# EAGLE board temperature measurement module (EAGLE 5.03)
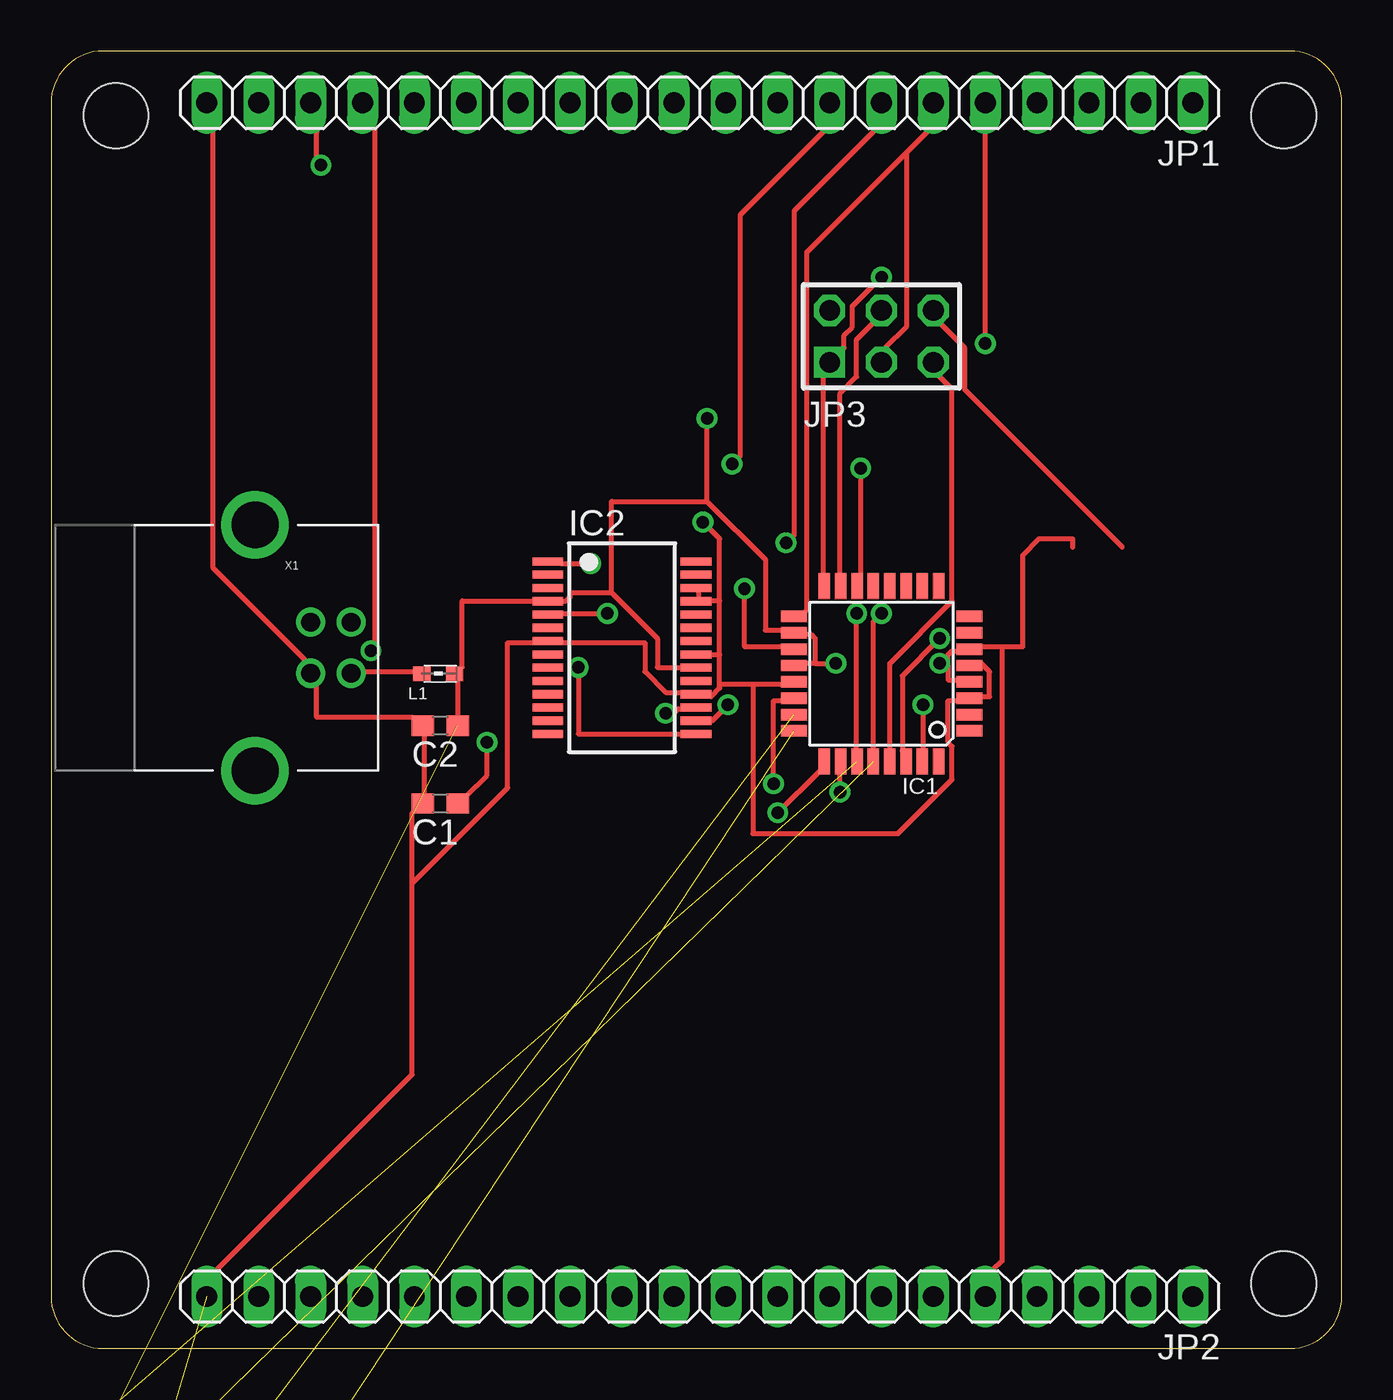
[diagram p0: board, top side]
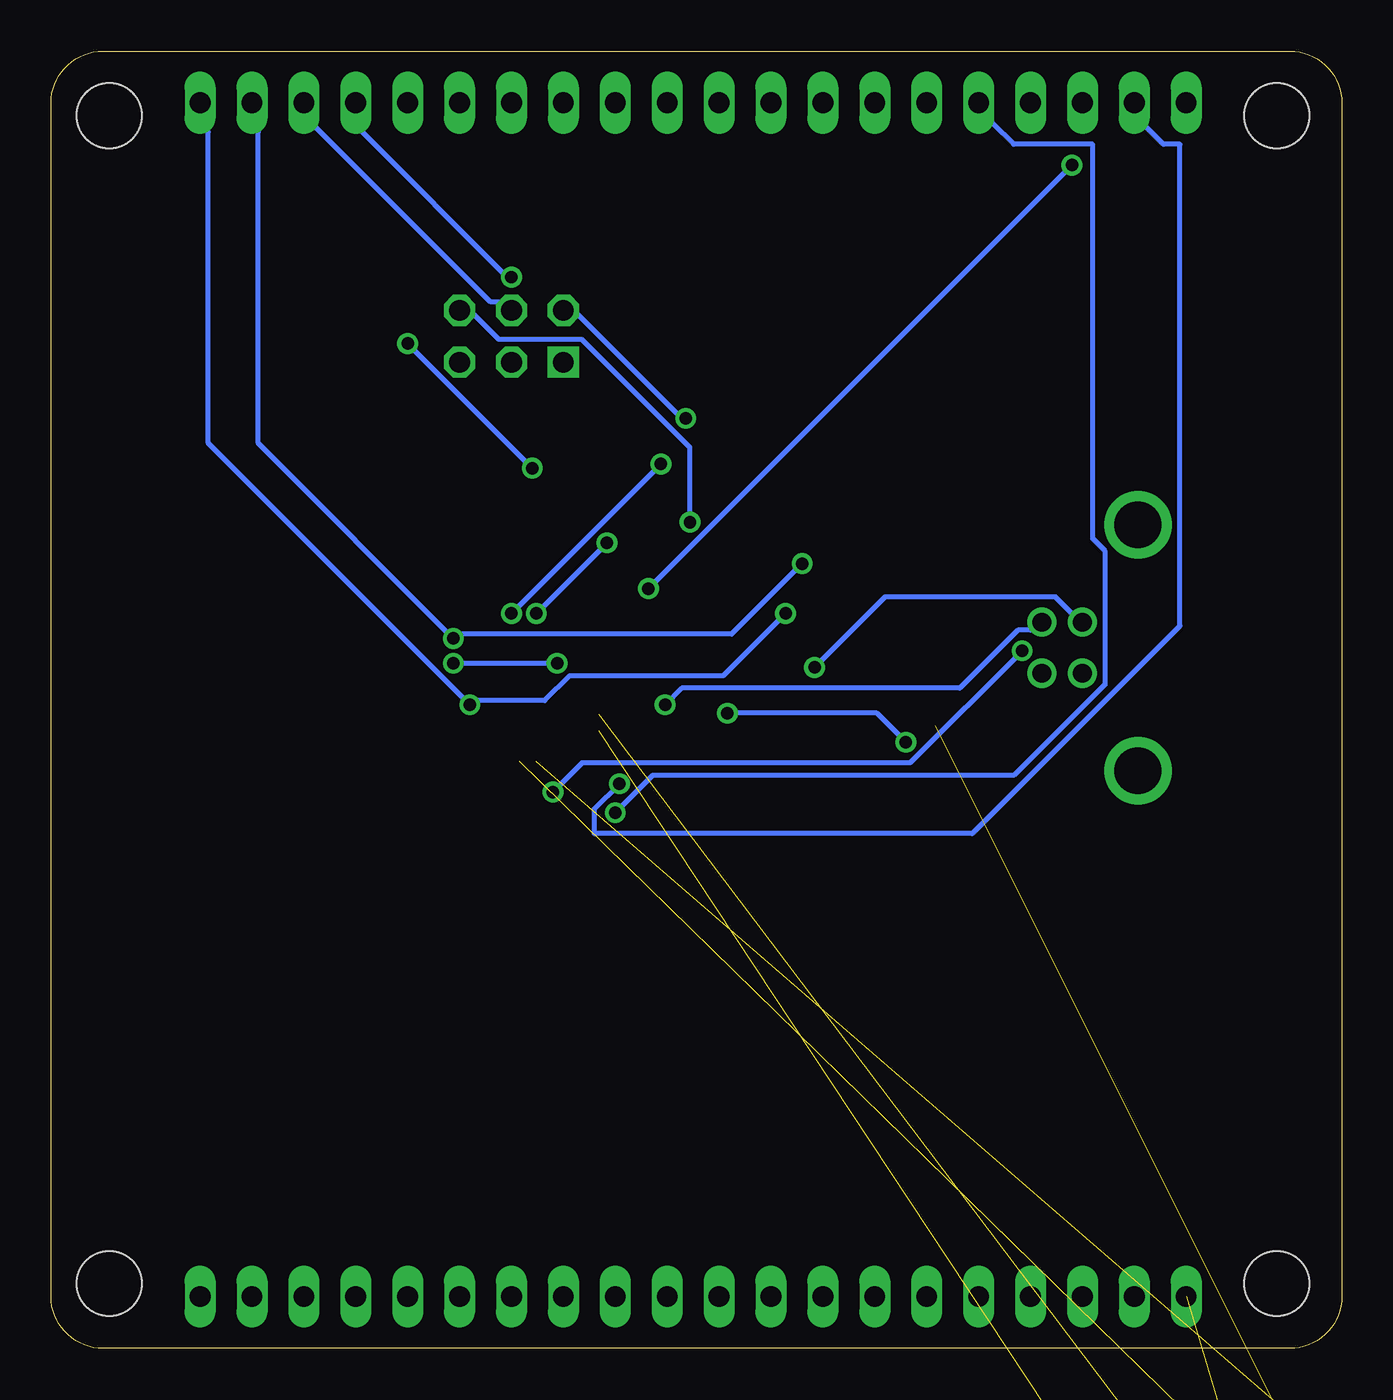
[diagram p1: board, bottom side, seen from below]

Size 63.17 x 63.49 mm. Coordinates in mm from the lower left corner, seen from the top.
Outline: 60.63,0 arc90 63.17,2.54 63.17,60.95 arc90 60.63,63.49 2.54,63.49 arc90 0,60.95 0,2.54 arc90 2.54,0 60.63,0
Copper layers (1*16): Top 0.035mm / dielectric 1.5mm / Bottom 0.035mm
Design rules "default": minimum track width 10mil, minimum drill 24mil, track to track 8mil, track to pad 8mil, pad to pad 8mil, via to via 8mil, smd to smd 8mil, copper to edge 40mil, drill to drill 8mil, minimum pad ring 10mil, minimum via ring 8mil, stop-mask expansion 4mil, vias tented up to drill 0mil, thermal gap 10mil
Holes 3.17 mm at 3.17,3.17 60.33,3.17 60.33,60.33 3.17,60.33

## Footprints (pad centres in the part's own frame; a part is rotated, then mirrored left to right if it is on the bottom)
C0603 = smd 1.1 x 1: 1 -0.85,0; 2 0.85,0
TQFP32-08 = smd 1.27 x 0.559: 1 -4.293,2.8; 2 -4.293,2; 3 -4.293,1.2; 4 -4.293,0.4; 5 -4.293,-0.4; 6 -4.293,-1.2; 7 -4.293,-2; 8 -4.293,-2.8; 17 4.293,-2.8; 18 4.293,-2; 19 4.293,-1.2; 20 4.293,-0.4; 21 4.293,0.4; 22 4.293,1.2; 23 4.293,2; 24 4.293,2.8 | smd 0.559 x 1.27: 9 -2.8,-4.293; 10 -2,-4.293; 11 -1.2,-4.293; 12 -0.4,-4.293; 13 0.4,-4.293; 14 1.2,-4.293; 15 2,-4.293; 16 2.8,-4.293; 25 2.8,4.293; 26 2,4.293; 27 1.2,4.293; 28 0.4,4.293; 29 -0.4,4.293; 30 -1.2,4.293; 31 -2,4.293; 32 -2.8,4.293
SSOP28 = smd 0.4 x 1.5: 1 -4.225,-3.625; 2 -3.575,-3.625; 3 -2.925,-3.625; 4 -2.275,-3.625; 5 -1.625,-3.625; 6 -0.975,-3.625; 7 -0.325,-3.625; 8 0.325,-3.625; 9 0.975,-3.625; 10 1.625,-3.625; 11 2.275,-3.625; 12 2.925,-3.625; 13 3.575,-3.625; 14 4.225,-3.625; 15 4.225,3.625; 16 3.575,3.625; 17 2.925,3.625; 18 2.275,3.625; 19 1.625,3.625; 20 0.975,3.625; 21 0.325,3.625; 22 -0.325,3.625; 23 -0.975,3.625; 24 -1.625,3.625; 25 -2.275,3.625; 26 -2.925,3.625; 27 -3.575,3.625; 28 -4.225,3.625
1X20 = drill 1.016 long: 1 -24.13,0; 2 -21.59,0; 3 -19.05,0; 4 -16.51,0; 5 -13.97,0; 6 -11.43,0; 7 -8.89,0; 8 -6.35,0; 9 -3.81,0; 10 -1.27,0; 11 1.27,0; 12 3.81,0; 13 6.35,0; 14 8.89,0; 15 11.43,0; 16 13.97,0; 17 16.51,0; 18 19.05,0; 19 21.59,0; 20 24.13,0
AVR-ISP-6 = drill 1.016 square: 1 -2.54,-1.27 | drill 1.016 octagon: 2 -2.54,1.27; 3 0,-1.27; 4 0,1.27; 5 2.54,-1.27; 6 2.54,1.27
1X02 = drill 1.016 long: 1 -1.27,0; 2 1.27,0
SCREWTERMINAL-3.5MM-2 = drill 1.2 pad 2.032 square: 1 0,0 | drill 1.2 pad 2.032 round: 2 3.5,0
0603 = smd 0.85 x 0.7: 1 -0.9,0; 2 0.7,0
R0603 = smd 1.1 x 1: 1 -0.85,0; 2 0.85,0
0603' = smd 1 x 1.1: 1 -0.85,1.27; 2 0.85,1.27
USB-B-PTH = drill 0.914 round: D+ 0,1.25; D- 1.981,1.25; GND 0,-1.25; VBUS 1.981,-1.25 | drill 2.286 round: P$1 -2.718,-6.02; P$2 -2.718,6.02

## Placement (x,y rotation side)
C1  [C0603]  19.05,26.67 180 top
C2  [C0603]  19.05,30.48 180 top
IC1  ATMEGA168-20A  [TQFP32-08]  40.64,33.02 180 top
IC2  FT232RL  [SSOP28]  27.94,34.29 270 top
JP1  [1X20]  31.75,60.96 180 top
JP2  [1X20]  31.75,2.54 180 top
JP3  AVR-ISP-6  [AVR-ISP-6]  40.64,49.53 0 top
JP4  [1X02]  3.81,-34.29 0 top  (outside the outline)
JP5  [SCREWTERMINAL-3.5MM-2]  2.54,-40.64 0 top  (outside the outline)
L1  [0603]  19.05,33.02 0 top
R1  10k  [R0603]  1.27,-5.08 0 top  (outside the outline)
R2  10k  [R0603]  1.27,-10.16 0 top  (outside the outline)
R3  [R0603]  1.27,-16.51 0 top  (outside the outline)
R4  [R0603]  1.27,-21.59 0 top  (outside the outline)
U$1  THERMISTOR  [0603']  1.27,-27.94 0 top  (outside the outline)
X1  USBPTH  [USB-B-PTH]  12.7,34.29 0 top

## Library data of the parts
C1 C2 R1-R4 = rcl
IC1 = avr
IC2 = ftdichip
JP1 JP2 JP4 = pinhead
JP3 = atmel-1
JP5 X1 = SparkFun
L1 = wuerth-elektronik
U$1 = nublabs

## Nets
+3.3V: JP2.6
+3V3: C1.1 IC2.17
+5V: JP2.4
+V: JP2.8
-5V: JP2.7
-V: JP2.9
ALARM: JP1.14
AN0: IC1.25 JP1.16
AN1: IC1.26 JP1.17
AN2: IC1.19 JP1.18
AN3: IC1.22 JP1.19
CD: JP1.10
CHARGE: JP2.10
CS: IC1.14 JP1.5
GND: C1.2 C2.2 IC1.3 IC1.5 IC1.21 IC2.7 IC2.18 IC2.21 IC2.25 IC2.26 JP1.20 JP2.20 JP3.6 R4.1 X1.GND
LIPO_BATT: JP2.1
LOG: JP1.12
MISO: IC1.16 JP1.4 JP3.1
MOSI: IC1.15 JP1.3 JP3.4
N$1: JP2.11
N$2: IC1.24 JP4.2 JP5.2 R4.2 U$1.2
N$3: IC1.23 JP4.1 JP5.1 R3.1 U$1.1
N$6: JP2.12
N$7: JP2.13
N$8: IC2.15 X1.D+
N$9: IC2.16 X1.D-
N$11: JP2.14
N$12: JP2.15
N$13: JP2.16
N$14: JP2.17
N$15: JP2.18
N$16: JP2.19
N$19: L1.1 X1.VBUS
N$32: JP1.15
ONE_WIRE: JP1.9
OTHER_BATT: JP2.2
RIN: JP1.13
RST: IC1.29 JP3.5
RX: IC1.30 IC2.1 JP1.2
SCK: IC1.17 JP1.6 JP3.3
SCL: IC1.28 JP1.8 R2.1
SDA: IC1.27 JP1.7 R1.1
SW: JP1.11
TX: IC1.31 IC2.5 JP1.1
VCC: C2.1 IC1.4 IC1.6 IC1.18 IC1.20 IC2.4 IC2.20 JP2.5 JP3.2 L1.2 R1.2 R2.2 R3.2
WALL_SUPPLY: JP2.3

## Tracks (layer width: path | path; a pad name or v marks a point on that pad's centre or on a via)
+3V3  (via drill 0.61)
  Top 0.254: v21.34,29.67 21.34,28.04 20.32,27.03 C1.1 | v30.07,31.09 30.48,31.09 30.68,31.29 30.89,31.29 IC2.17
  Bottom 0.254: v21.34,29.67 22.76,31.09 v30.07,31.09
AN0  (via drill 0.61)
  Top 0.254: v35.56,26.21 37.59,28.25 IC1.25
  Bottom 0.254: v35.56,26.21 33.73,28.04 16.05,28.04 11.58,32.51 11.58,39.01 12.19,39.62 12.19,58.93 16.05,58.93 17.07,59.94 JP1.16
AN1  (via drill 0.61)
  Top 0.254: v38.61,27.23 38.61,28.25 IC1.26 | v15.65,34.14 15.85,34.34 15.85,59.74 JP1.17
  Bottom 0.254: v38.61,27.23 37.19,28.65 21.13,28.65 v15.65,34.14
AN2  (via drill 0.61)
  Top 0.254: v33.93,37.19 33.93,34.34 35.76,34.34 IC1.19 | v13.21,57.91 13.01,58.12 13.01,59.54 JP1.18
  Bottom 0.254: v33.93,37.19 v13.21,57.91
AN3  (via drill 0.61)
  Top 0.254: v35.36,27.64 35.36,31.7 35.76,31.7 IC1.22
  Bottom 0.254: v35.36,27.64 36.58,26.42 36.58,25.2 18.09,25.2 7.92,35.36 7.92,58.93 8.74,58.93 9.55,59.74 JP1.19
CS  (via drill 0.61)
  Top 0.254: v39.62,43.08 39.62,37.8 IC1.14 | v45.72,49.17 JP1.5
  Bottom 0.254: v39.62,43.08 v45.72,49.17
GND  (via drill 0.61)  (1 unrouted)
  Top 0.254: 52.43,39.22 44.7,46.94 44.7,48.97 43.48,50.19 JP3.6 | IC1.5 45.52,33.53 45.92,33.12 45.92,31.9 45.52,31.9 IC1.3 44.5,31.7 43.89,31.7 43.89,29.67 44.09,29.46 44.09,27.84 41.45,25.2 34.34,25.2 34.34,32.51 | IC2.26 31.7,37.19 31.7,36.58 IC2.25 32.31,36.58 32.72,36.58 | 32.72,32.51 34.34,32.51 | 34.34,32.51 35.76,32.51 IC1.21 | 32.72,32.51 32.72,32.31 32.31,31.9 IC2.18 30.89,32.11 30.07,32.11 29.06,33.12 29.06,34.54 24.99,34.54 IC2.7 23.57,34.54 22.35,34.54 22.35,27.43 17.68,22.76 | 32.72,33.93 32.31,33.93 IC2.21 | 32.72,32.51 32.72,33.93 | 32.72,33.93 32.72,36.58 | v31.9,40.44 32.72,39.62 32.72,36.58 | 17.68,22.76 17.68,26.21 C1.2 18.29,27.03 18.29,30.07 C2.2 17.68,30.89 13.01,30.89 13.01,32.51 X1.GND 12.39,33.73 7.92,38.2 7.92,59.54 JP1.20 | 17.68,22.76 17.68,13.41 8.13,3.86 JP2.20
  Bottom 0.254: v31.9,40.44 31.9,44.09 37.19,49.38 41.25,49.38 42.47,50.6 JP3.6
MISO  (via drill 0.61)
  Top 0.254: IC1.16 37.8,37.8 37.8,47.55 JP3.1 38.81,48.97 38.81,49.58 39.22,49.99 39.22,51 v40.64,52.43
  Bottom 0.254: v40.64,52.43 40.84,52.43 47.95,59.54 JP1.4
MOSI
  Top 0.254: IC1.15 38.61,37.8 38.61,46.74 39.42,47.55 39.42,49.38 40.23,50.19 JP3.4
  Bottom 0.254: JP1.3 50.19,59.74 41.66,51.21 41.25,51.21 JP3.4
N$2  (4 unrouted)
N$3  (4 unrouted)
N$8  (via drill 0.61)
  Top 0.254: v25.81,33.33 25.81,30.07 30.89,30.07 IC2.15
  Bottom 0.254: v25.81,33.33 22.35,36.78 14.02,36.78 13.21,35.97 X1.D+
N$9  (via drill 0.61)
  Top 0.254: v33.12,31.5 32.31,30.68 IC2.16
  Bottom 0.254: v33.12,31.5 32.31,32.31 18.69,32.31 15.85,35.15 15.24,35.15 X1.D-
N$19
  Top 0.254: L1.1 17.88,33.12 15.24,33.12 X1.VBUS
RST
  Top 0.254: IC1.29 41.05,29.26 41.05,33.53 44.09,36.58 44.09,46.94 43.48,47.55 JP3.5
RX  (via drill 0.61)
  Top 0.254: v43.48,34.75 41.66,32.92 41.66,29.26 IC1.30 | v26.42,38.41 24.99,38.41 IC2.1
  Bottom 0.254: JP1.2 53.03,59.54 53.03,44.3 v43.48,34.75 43.08,34.95 29.87,34.95 v26.42,38.41
SCK
  Top 0.254: 41.86,58.52 42.88,59.54 JP1.6 | 41.86,58.52 36.98,53.65 36.98,36.17 36.78,35.97 IC1.17 | 41.86,58.52 41.86,49.99 40.84,48.97 JP3.3
SCL  (via drill 0.61)  (1 unrouted)
  Top 0.254: v40.64,35.97 40.23,35.56 40.23,29.26 IC1.28 | v33.33,43.28 33.73,43.69 33.73,55.47 37.8,59.54 JP1.8
  Bottom 0.254: v40.64,35.97 v33.33,43.28
SDA  (via drill 0.61)  (1 unrouted)
  Top 0.254: v39.42,35.97 39.42,29.26 IC1.27 | v35.97,39.42 36.37,39.83 36.37,55.68 40.23,59.54 JP1.7
  Bottom 0.254: v39.42,35.97 v35.97,39.42
TX  (via drill 0.61)
  Top 0.254: v42.67,31.5 42.67,29.26 IC1.31 | v27.23,35.97 24.99,35.97 IC2.5
  Bottom 0.254: JP1.1 55.47,59.54 55.47,44.3 v42.67,31.5 42.27,31.7 39.01,31.7 37.8,32.92 30.28,32.92 v27.23,35.97
VCC  (via drill 0.61)  (3 unrouted)
  Top 0.254: 37.39,33.53 36.78,33.53 IC1.20 | 37.39,33.53 37.39,34.75 37.19,34.95 36.78,34.95 IC1.18 35.76,35.15 34.95,35.15 34.95,38.61 32.11,41.45 | C2.1 19.91,30.89 19.91,32.72 L1.2 20.12,33.33 20.12,36.58 23.57,36.58 IC2.4 24.99,36.58 25.2,36.58 25.4,36.78 25.4,36.98 27.43,36.98 | 27.43,36.98 29.67,34.75 29.67,33.33 30.89,33.33 IC2.20 | 32.11,41.45 27.43,41.45 27.43,36.98 | 32.11,41.45 v32.11,45.52 | 43.89,33.53 43.89,33.93 44.09,34.14 44.5,34.14 IC1.6 45.52,34.34 46.53,34.34 | 43.89,33.53 43.89,32.72 44.5,32.72 IC1.4 | 46.53,34.34 47.55,34.34 47.55,38.81 48.36,39.62 49.99,39.62 49.99,39.22 | 46.53,34.34 46.53,4.27 46.13,3.86 JP2.5 | 37.39,33.53 v38.41,33.53 | v43.48,33.53 43.89,33.53
  Bottom 0.254: v32.11,45.52 32.31,45.52 37.39,50.6 JP3.2 | v38.41,33.53 v43.48,33.53